# EAGLE board AdaptadorWifi (EAGLE 6.5.0)
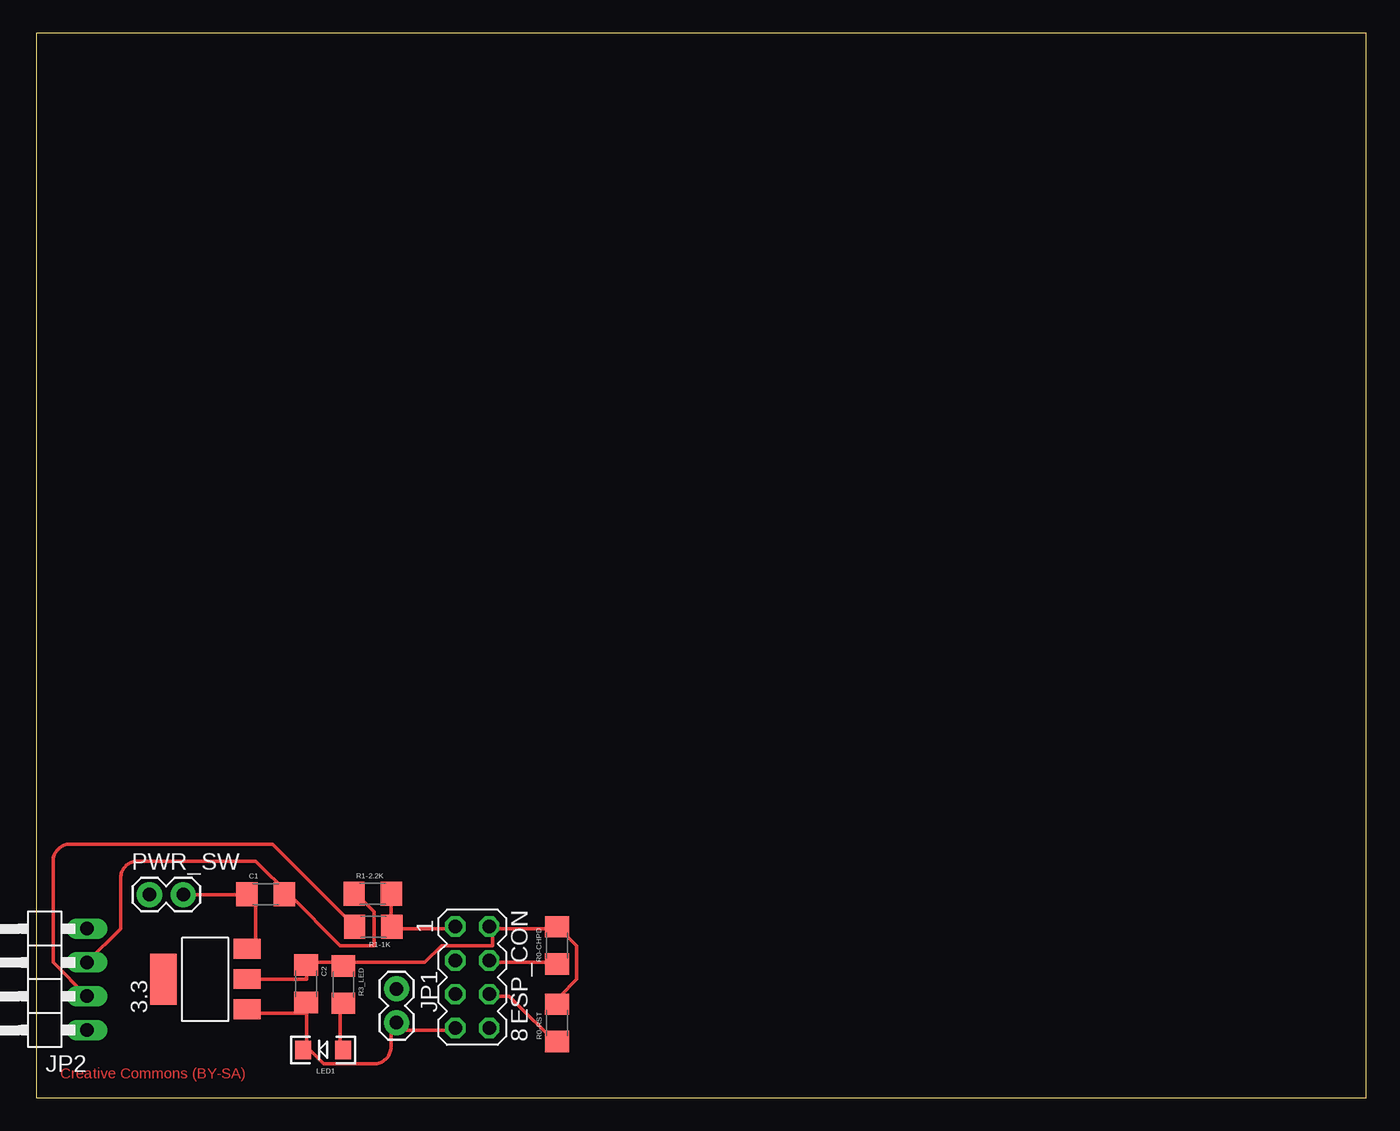
[diagram p0: board, top side]
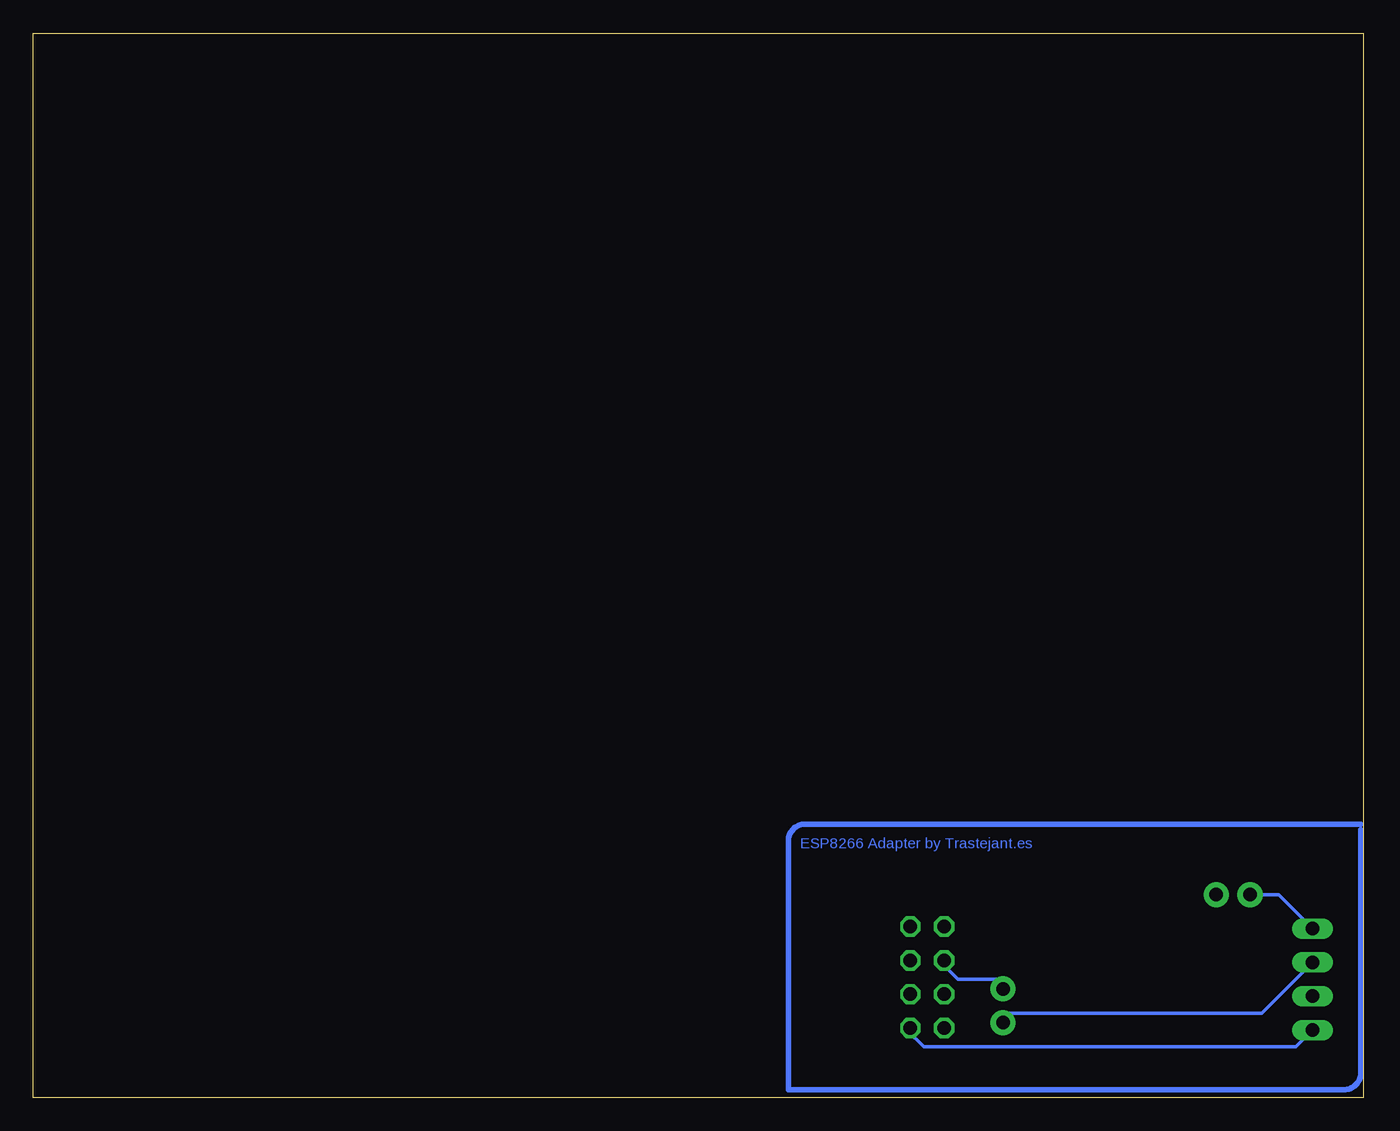
[diagram p1: board, bottom side, seen from below]

Size 100 x 80 mm. Coordinates in mm from the lower left corner, seen from the top.
Outline: 0,0 100,0 100,80 0,80 0,0
Copper layers (1*16): Top 0.035mm / dielectric 1.5mm / Bottom 0.035mm
Design rules "default": minimum track width 10mil, minimum drill 24mil, track to track 8mil, track to pad 8mil, pad to pad 8mil, via to via 8mil, smd to smd 8mil, copper to edge 40mil, drill to drill 8mil, minimum pad ring 10mil, minimum via ring 8mil, stop-mask expansion 4mil, vias tented up to drill 0mil, thermal gap 10mil

## Footprints (pad centres in the part's own frame; a part is rotated, then mirrored left to right if it is on the bottom)
SOT223 = smd 1.499 x 2.007: 1 -2.261,-3.15; 2 0.025,-3.15; 3 2.311,-3.15 | smd 3.81 x 2.007: 4 0,3.15
1206 = smd 1.6 x 1.8: 1 -1.4,0; 2 1.4,0
MA04-2 = drill 1.016 octagon: 1 -3.81,-1.27; 2 -3.81,1.27; 3 -1.27,-1.27; 4 -1.27,1.27; 5 1.27,-1.27; 6 1.27,1.27; 7 3.81,-1.27; 8 3.81,1.27
1X02 = drill 1.016 pad 1.88: 1 0,0; 2 2.54,0
1X04/90 = drill 1.016 long: 1 -3.81,-3.81; 2 -1.27,-3.81; 3 1.27,-3.81; 4 3.81,-3.81
LED-1206 = smd 1.2 x 1.4: A -1.5,0; C 1.5,0

## Placement (x,y rotation side)
3.3  REG1117  [SOT223]  12.7,8.89 90 top
C1  10mF  [1206]  17.25,15.3 0 top
C2  100mF  [1206]  20.3,8.56 270 top
ESP_CON  [MA04-2]  32.78,9.04 270 top
JP1  [1X02]  27.08,8.18 270 top
JP2  [1X04/90]  0,8.89 90 top
LED1  [LED-1206]  21.57,3.59 180 top
PWR_SW  [1X02]  8.51,15.27 0 top
R0-CHPD  [1206]  39.15,11.44 90 top
R0-RST  [1206]  39.17,5.61 90 top
R1-1K  [1206]  25.34,12.84 180 top
R1-2.2K  [1206]  25.29,15.31 0 top
R3_LED  [1206]  23.09,8.49 270 top

## Library data of the parts
3.3 = burr-brown; MPN: REG1117; OC_FARNELL: 1097566; OC_NEWARK: 14P6981
C1 C2 JP1 LED1 PWR_SW R0-CHPD R0-RST R1-1K R1-2.2K R3_LED = SparkFun
ESP_CON = con-lstb; OC_FARNELL: unknown; OC_NEWARK: unknown
JP2 = pinhead

## Nets
CHPD: ESP_CON.6 R0-RST.1
ES_RX: ESP_CON.1 R1-1K.1 R1-2.2K.2
GND: 3.3.1 C1.2 C2.2 ESP_CON.7 JP1.2 JP2.3 LED1.C R1-2.2K.1
GPIO0: ESP_CON.3 JP1.1
GPIO2: ESP_CON.5
N$1: LED1.A R3_LED.2
N$2: 3.3.3 C1.1 PWR_SW.2
RST: ESP_CON.4 R0-CHPD.1
RX: JP2.2 R1-1K.2
TX: ESP_CON.8 JP2.1
V3.3: 3.3.2 C2.1 ESP_CON.2 R0-CHPD.2 R0-RST.2 R3_LED.1
VIN: JP2.4 PWR_SW.1

## Tracks (layer width: path | path; a pad name or v marks a point on that pad's centre or on a via)
CHPD
  Top 0.254: R0-RST.1 39.37,3.81 35.56,7.62 34.29,7.62 ESP_CON.6
ES_RX
  Top 0.254: 26.67,12.7 26.67,15.24 R1-2.2K.2 | 26.67,12.7 31.75,12.7 ESP_CON.1 | 26.67,12.7 R1-1K.1
GND
  Top 0.254: 19.05,15.24 22.86,11.43 25.4,11.43 25.4,13.97 24.13,15.24 R1-2.2K.1 | 20.32,6.35 20.32,7.62 C2.2 | 20.32,6.35 20.32,3.81 | 20.32,6.35 16.51,6.35 3.3.1 | 26.67,5.08 31.75,5.08 ESP_CON.7 | 20.32,3.81 21.59,2.54 25.4,2.54 arc90 26.67,3.81 26.67,5.08 | 20.32,3.81 LED1.C | 26.67,5.08 JP1.2 | 19.05,15.24 16.51,17.78 7.62,17.78 arc90 6.35,16.51 6.35,12.7 JP2.3 | 19.05,15.24 C1.2
  Bottom 0.254: JP2.3 7.62,6.35 26.67,6.35 JP1.2
GPIO0
  Bottom 0.254: ESP_CON.3 31.75,10.16 30.48,8.89 26.67,8.89 JP1.1
N$1
  Top 0.254: LED1.A 22.86,3.81 22.86,6.35 R3_LED.2
N$2
  Top 0.254: 3.3.3 16.51,11.43 16.51,15.24 C1.1 15.24,15.24 11.43,15.24 PWR_SW.2
N$3
  Bottom 0.406: 0.18,20.56 41.95,20.56 arc-90 43.22,19.29 43.22,0.59 1.45,0.59 arc-90 0.18,1.86 0.18,20.15
RST
  Top 0.254: R0-CHPD.1 39.37,10.16 34.29,10.16 ESP_CON.4
RX
  Top 0.254: JP2.2 1.27,10.16 1.27,17.78 arc-90 2.54,19.05 17.78,19.05 24.13,12.7 R1-1K.2
TX
  Bottom 0.254: JP2.1 5.08,3.81 33.02,3.81 34.29,5.08 ESP_CON.8
V3.3
  Top 0.254: 22.86,10.16 20.32,10.16 | 20.32,10.16 20.32,8.89 16.51,8.89 3.3.2 | 20.32,10.16 C2.1 | 34.29,12.7 39.37,12.7 | 39.37,12.7 40.64,11.43 40.64,8.89 39.37,7.62 R0-RST.2 | 39.37,12.7 R0-CHPD.2 | 22.86,10.16 29.21,10.16 30.48,11.43 34.29,11.43 34.29,12.7 | 22.86,10.16 R3_LED.1 | 34.29,12.7 ESP_CON.2
VIN
  Bottom 0.254: JP2.4 6.35,15.24 7.62,15.24 PWR_SW.1

## Text on the board
Top: Creative Commons (BY-SA)
Bottom: ESP8266 Adapter by Trastejant.es